# Altium PCB PCB_STM32F411CEU6 BLUE-TOOTH_2023-03-25.pcbdoc (part 2 of 2)
Units mil, origin at the board's own origin, x right, y up, seen from the top; angles counter-clockwise.
Board outline 4590 x 3510 mil, 2 copper layers (Top Layer, Bottom Layer); 160 components, 126 nets, 614 pads, 625 vias.
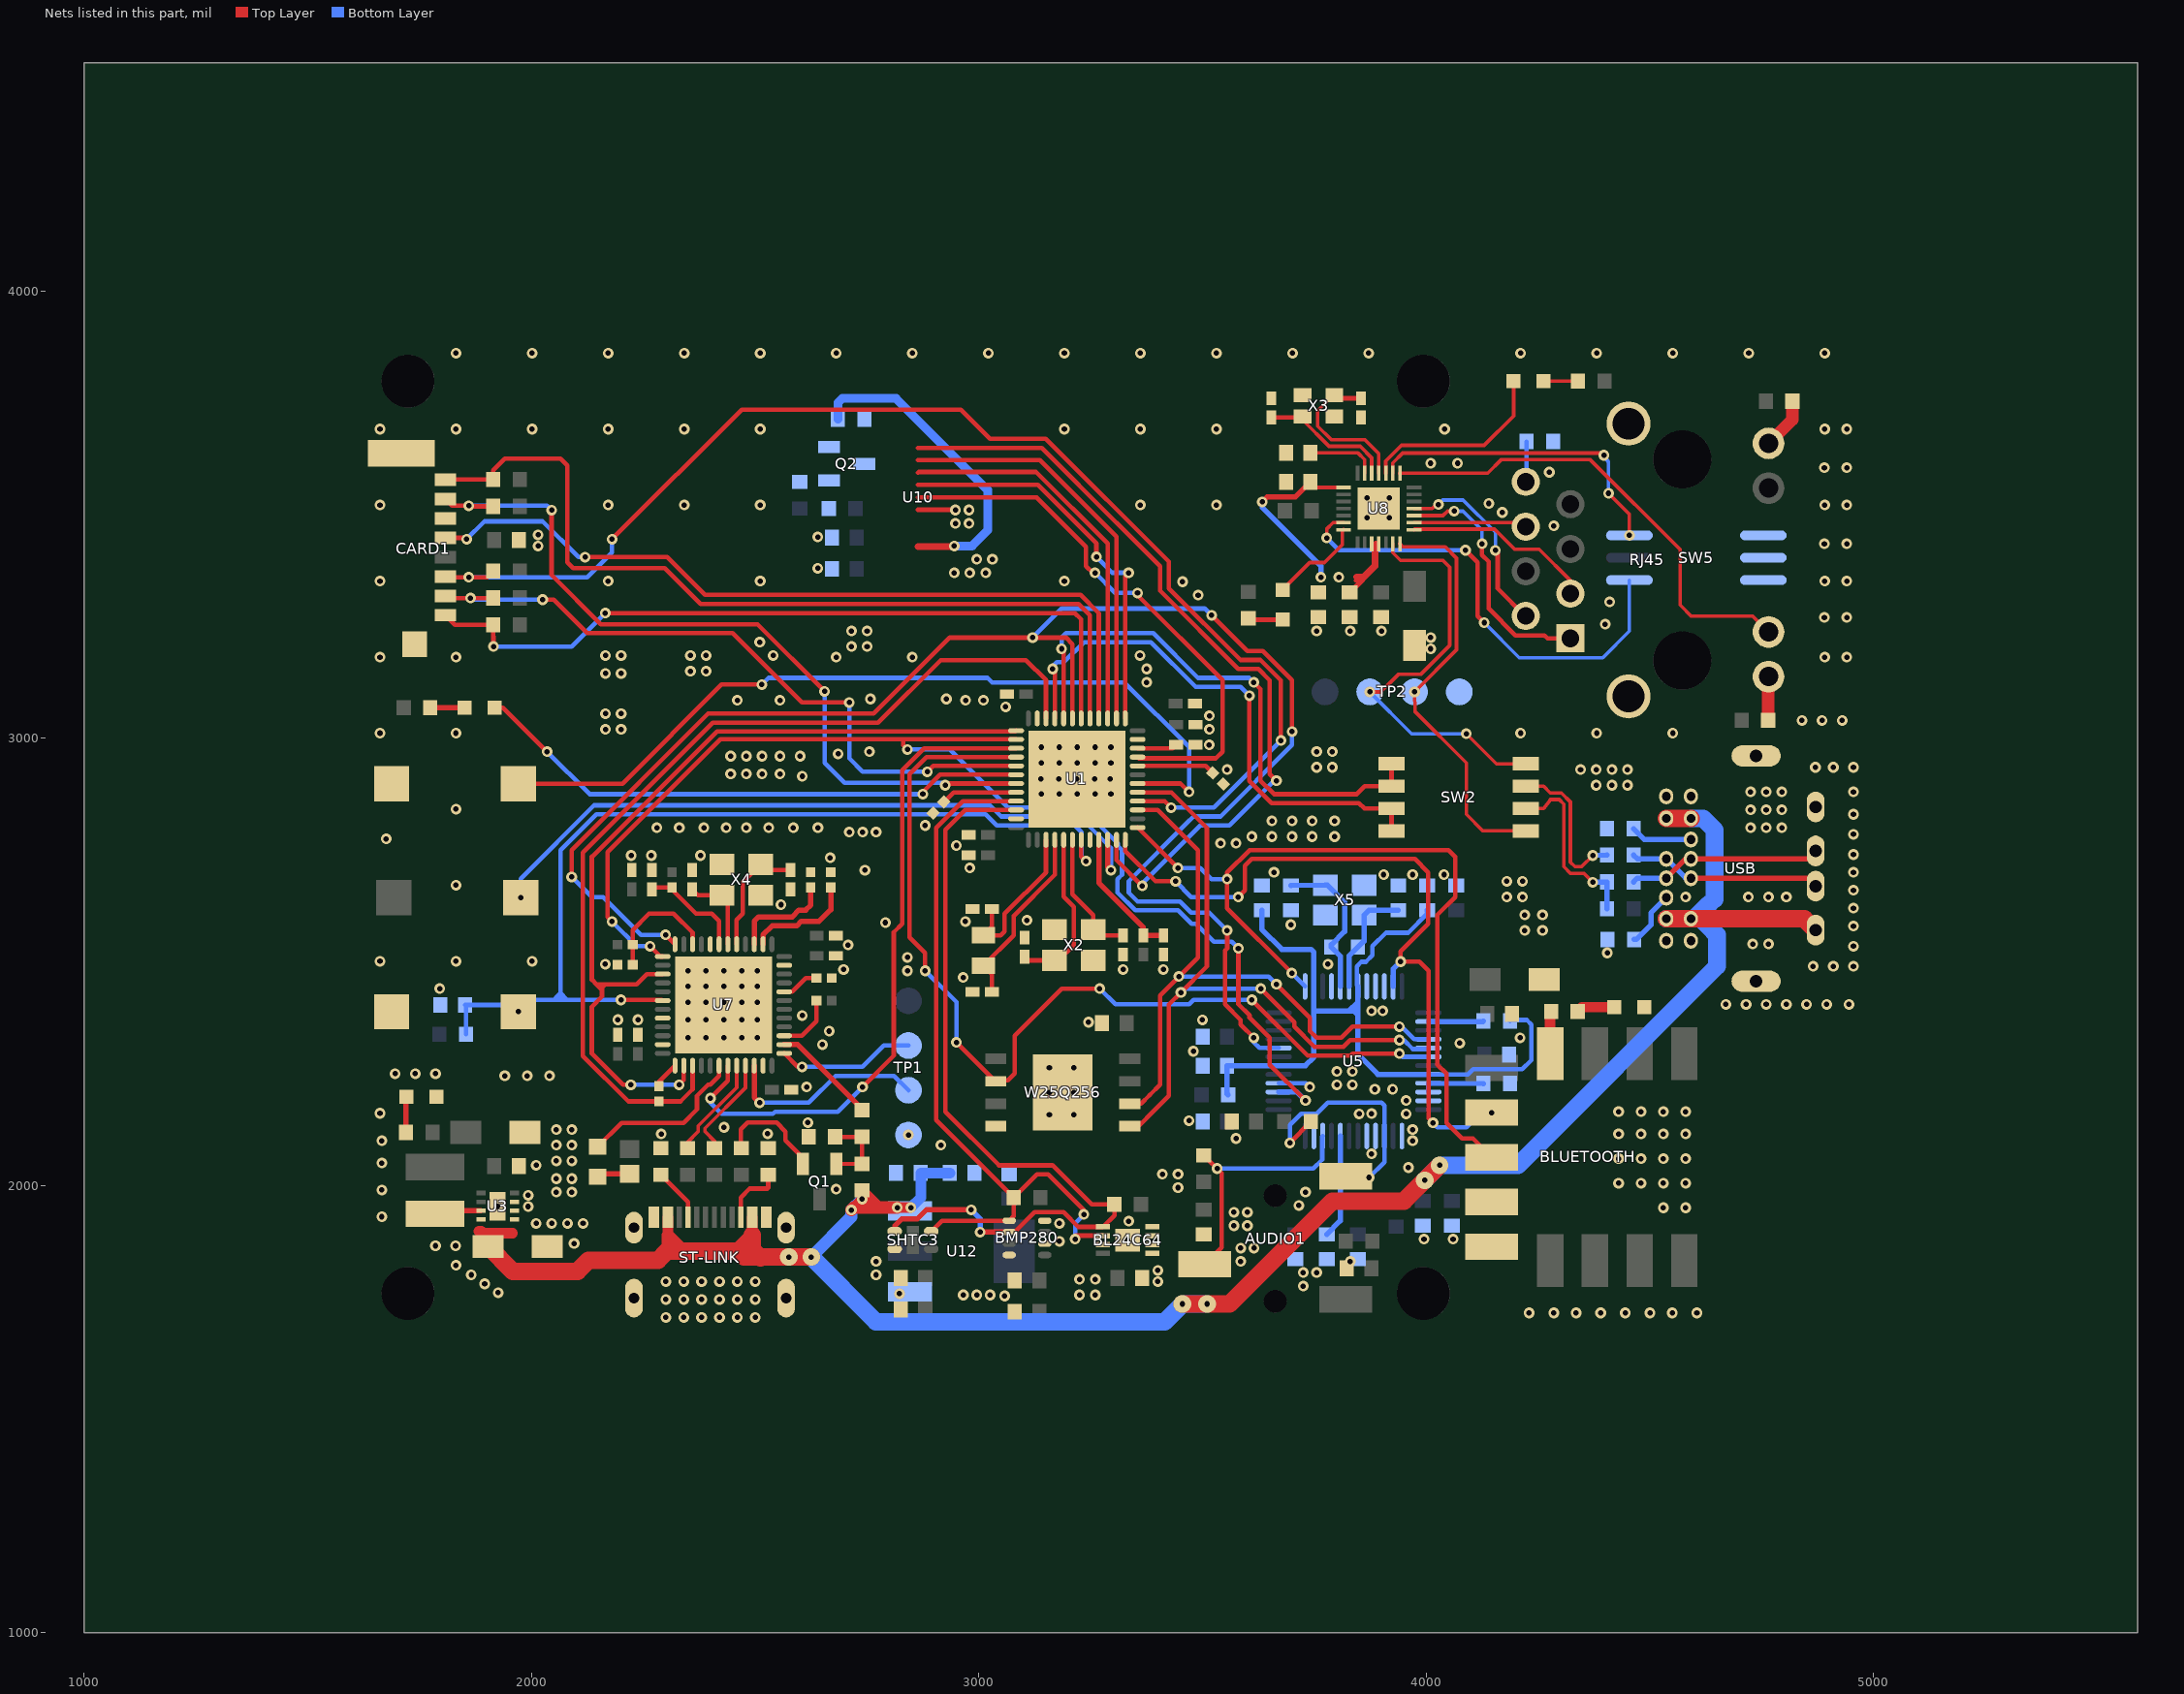
[diagram p2: the nets of this part, all layers, seen from the top]

## Via types
v1: diameter 24.02, hole 12, Top Layer to Bottom Layer, tented both sides, 546 vias
v2: diameter 24.02, hole 12.01, Top Layer to Bottom Layer, tented both sides, 73 vias
v3: diameter 39.37, hole 12, Top Layer to Bottom Layer, tented both sides, 6 vias

## Nets (pads, with @x,y where several pads share a name; then routed paths per layer and width w, separated by ;. In a path a pad name is that pad's centre, name@x,y a point inside that pad or via, vN(x,y) a via of type N, cw(c..) or ccw(c..) an arc to the next point about the centre after c; other vN are vias at no path point) (continued)
GND: BL24C64.1 BL24C64.2 BL24C64.3 BL24C64.4 BL24C64.7 BL24C64.9 BLUETOOTH.8 BLUETOOTH.9 BMP280.1 BMP280.5 BMP280.7 C1.2 C2.1 C3.2 C4.1 C5.1 C6.2 C7.1 C8.1 C9.1 C10.1 C11.2 C12.1 C13.2 C14.1 C15.1 C16.1 C17.1 C18.1 C19.1 C20.1 C21.1 C22.1 C23.2 C24.1 C25.2 C26.2 C27.2 C28.1 C30.1 C31.1 C32.1 C33.1 C34.1 C35.2 C36.2 C37.1 C38.2 C39.2 C40.2 C41.1 C42.1 C43.1 C44.1 C45.1 C46.1 C47.1 C48.1 C49.1 C50.1 C51.1 C52.1 C53.1 C54.2 C55.2 C56.2 C57.1 C58.1 C59.1 C60.1 C61.1 C62.1 C63.1 C64.1 CARD1.6 CARD1.9 CARD1.10 KEY2.2 LINK.2 POWER.2 Q2.2 R2.2 R3.1 R6.2 R7.1 R9.1 R13.2 R24.2 R30.2 R32.2 R33.2 R39.1 R42.2 R44.1 RESET.2 RJ45.SH1 RJ45.SH2 SHTC3.4 ST-LINK.1 ST-LINK.12 ST-LINK.13 ST-LINK.14 ST-LINK.15 ST-LINK.16 SW5.1 SW5.2 SW5.3 TP1.4 TP2.4 U1.8 U1.23 U1.35 U1.47 U1.49 U3.2 U3.3 U3.9 U5.4 U5.16 U5.20 U5.21 U5.22 U5.35 U5.37 U5.40 U5.41 U5.47 U7.8 U7.20 U7.23 U7.35 U7.47 U7.49 U8.29 U10.8 U10.13 U12.1 USB.1 USB.8 USB.9 USB.16 USB.20 USB.21 W25Q256.4 W25Q256.9 X2.2 X2.4 X3.2 X3.4 X4.2 X4.4 X5.2 X5.4 | length 156.9
  Top Layer w11: U10.8@2863.8,3511.4 v1(2947.57,3510.48)
  Bottom Layer w10: U5.4@3670.09,2228.59 3731.01,2228.59 v1(3739.61,2220)
  other v1: 2300.01,1705 2340.01,1705 2380.01,1705 2420.01,1705 2460.01,1705 2500.01,1705 4230.01,1715 4285.01,1715 4335.01,1715 4390.01,1715 4445.01,1715 4500.01,1715 4550.01,1715 4605.01,1715 2300.01,1745 2340.01,1745 2380.01,1745 2420.01,1745 2460.01,1745 2500.01,1745 3057.41,1752.8 2965.01,1755 2995.01,1755 3025.01,1755 3225.01,1755 3260.01,1755 2822.41,1757.8 1925.01,1760 3725.01,1775 1895.01,1780 2300.01,1785 2340.01,1785 2380.01,1785 2420.01,1785 2460.01,1785 2500.01,1785 3400.01,1785 3225.01,1790 3260.01,1790 1865.01,1800 2770.01,1800 3725.01,1805 3755.01,1805 3400.01,1810 2770.01,1830 3585.01,1830 3830.01,1830 3585.01,1860 3615.01,1860 1830.01,1865 2095.01,1870 3180.01,1875 3332.41,1877.8 3995.01,1880 4060.01,1880 3570.01,1910 3600.01,1910 2010.01,1915 2045.01,1915 2080.01,1915 2115.01,1915 3180.01,1915 3335.01,1920 1665.01,1930 3570.01,1940 3600.01,1940 4530.01,1950 4580.01,1950 1992.4,1952.8 1923.81,1953.6 3715.01,1955 1992.4,1977.8 2055.01,1985 2090.01,1985 3730.01,1985 3445.01,1995 4430.01,2005 4480.01,2005 4530.01,2005 4580.01,2005 2055.01,2015 2090.01,2015 3410.01,2025 3445.01,2025 3960.01,2040 2010.01,2045 1665.01,2050 2055.01,2055 2090.01,2055 4430.01,2060 4480.01,2060 4530.01,2060 4580.01,2060 3877.57,2070.48 2055.01,2090 2090.01,2090 2915.01,2090 3969.61,2100 3574.61,2105 2842.41,2112.8 2289.61,2115 2527.57,2115.48 4430.01,2115 4480.01,2115 4530.01,2115 4580.01,2115 2055.01,2125 2090.01,2125 3969.61,2125 2430.01,2130 2617.57,2140.48 3469.61,2145 3157.41,2157.8 3212.41,2157.8 3850.01,2160 3877.57,2160.48 3955.01,2160 4430.01,2165 4480.01,2165 4530.01,2165 4580.01,2165 3955.01,2190 3157.41,2207.8 3212.41,2207.8 3885.01,2215 3925.01,2215 2614.61,2220 3800.01,2225 3835.01,2225 1940.01,2245 1990.01,2245 2040.01,2245 1695.01,2250 1740.01,2250 1785.01,2250 3800.01,2255 3835.01,2255 3157.41,2262.8 3212.41,2262.8 3479.61,2300 2650.01,2315 2350.01,2330 2390.01,2330 2430.01,2330 2470.01,2330 2505.01,2330 4209.6,2330 2665.01,2345 3245.01,2365 2192.57,2370.48 2237.57,2370.48 2350.01,2370 2390.01,2370 2430.01,2370 2470.01,2370 2505.01,2370 3499.61,2370 2605.01,2380 3877.57,2390.48 3902.57,2390.48 4670.01,2405 4715.01,2405 4760.01,2405 4805.01,2405 4850.01,2405 4895.01,2405 4945.01,2405 2350.01,2410 2390.01,2410 2430.01,2410 2470.01,2410 2505.01,2410 1794.61,2440 2350.01,2445 2390.01,2445 2430.01,2445 2470.01,2445 2505.01,2445 2964.61,2465 2350.01,2480 2390.01,2480 2430.01,2480 2470.01,2480 2505.01,2480 2840.01,2480 2697.41,2482.8 3322.41,2482.8 3412.41,2482.8 4865.01,2490 4910.01,2490 4955.01,2490 2164.61,2495 3780.01,2495 2840.01,2510 4405.01,2520 4955.01,2535 2707.41,2537.8 4730.01,2540 4765.01,2540 4220.01,2570 4260.01,2570 4955.01,2580 3697.41,2582.8 2969.61,2590 3107.41,2592.8 4220.01,2605 4260.01,2605 4955.01,2620 2557.41,2627.8 4180.01,2645 4215.01,2645 4580.01,2645 4720.01,2645 4765.01,2645 4805.01,2645 4955.01,2660 4180.01,2680 4215.01,2680 3904.61,2695 3969.61,2695 4039.61,2695 3659.61,2700 4955.01,2700 2745.01,2705 2979.61,2710 2667.41,2732.8 2222.41,2737.8 2267.41,2737.8 2377.41,2737.8 4955.01,2740 2949.61,2760 3540.01,2765 3575.01,2765 1675.01,2775 3610.01,2780 3655.01,2780 3700.01,2780 3745.01,2780 3795.01,2780 4955.01,2785 2710.01,2790 2740.01,2790 2770.01,2790 2280.01,2800 2330.01,2800 2385.01,2800 2435.01,2800 2480.01,2800 2530.01,2800 2585.01,2800 2640.01,2800 4725.01,2800 4760.01,2800 4795.01,2800 2879.61,2805 3655.01,2815 3700.01,2815 3745.01,2815 3795.01,2815 4955.01,2830 4725.01,2840 4760.01,2840 4795.01,2840 3140.01,2875 3140.01,2875 3180.01,2875 3180.01,2875 3220.01,2875 3220.01,2875 3260.01,2875 3260.01,2875 3295.01,2875 3295.01,2875 4725.01,2880 4760.01,2880 4795.01,2880 4955.01,2880 4380.01,2895 4415.01,2895 4450.01,2895 3138.82,2908.6 3178.82,2908.6 3218.82,2908.6 3258.82,2908.6 3293.82,2908.6 2605.01,2915 2445.01,2920 2480.01,2920 2515.01,2920 2555.01,2920 3554.61,2930 4345.01,2930 4380.01,2930 4415.01,2930 4450.01,2930 3755.01,2935 3790.01,2935 4870.01,2935 4910.01,2935 4955.01,2935 3140.01,2945 3180.01,2945 3220.01,2945 3260.01,2945 3295.01,2945 2445.01,2960 2480.01,2960 2515.01,2960 2555.01,2960 2600.01,2960 2685.01,2965 2755.01,2970 3755.01,2970 3790.01,2970 3140.01,2980 3180.01,2980 3220.01,2980 3260.01,2980 3295.01,2980 3514.61,2985 2165.01,3020 2200.01,3020 3515.01,3020 3515.01,3050 2165.01,3055 2200.01,3055 3059.61,3070 2460.01,3085 2555.01,3085 2970.01,3085 3010.01,3085 3375.01,3125 2165.01,3145 2200.01,3145 2355.01,3150 2390.01,3150 3375.01,3155 4940.01,3181.39 2165.01,3185 2200.01,3185 2355.01,3185 2390.01,3185 2540.01,3185 3360.01,3185 4010.01,3200 2510.01,3215 4010.01,3225 3755.01,3240 3830.01,3240 3900.01,3240 4400.01,3255 4890.01,3270 4940.01,3270 4410.01,3305 3490.01,3320 3455.01,3350 4940.01,3351.39 2944.61,3370 2979.61,3370 3015.01,3370 2639.61,3380 2995.01,3400 3030.01,3400 2014.61,3430 4890.01,3435 4940.01,3435 2639.61,3450 2014.61,3455 4285.01,3475 2947.57,3480.48 2977.57,3480.48 3867.41,3492.8 3917.41,3492.8 4170.01,3505 2977.57,3510.48 4940.01,3521.39 4140.01,3525 3867.41,3537.8 3917.41,3537.8 4275.01,3595 4890.01,3605 4940.01,3605 4010.01,3615 4070.01,3615 4940.01,3691.39
  other v2: 1831.02,1821.39 1785.01,1865 1665.01,1990 2681.01,1991.39 1665.01,2100 1661.02,2161.39 4075.07,2318.27 1661.02,2501.39 1831.02,2501.39 2001.02,2501.39 2790.93,2587.79 1831.02,2671.39 1831.02,2841.39 1661.02,3011.39 1831.02,3011.39 4211.02,3011.39 4381.02,3011.39 4551.02,3011.39 4840.01,3040 4885.01,3040 4930.01,3040 2757.22,3087.79 2927.22,3087.79 1661.02,3181.39 1831.02,3181.39 2681.01,3181.39 2851.01,3181.39 4891.02,3181.39 2715.01,3205 2750.01,3205 2715.01,3240 2750.01,3240 1661.02,3351.39 2171.01,3351.39 2511.01,3351.39 3191.01,3351.39 4891.02,3351.39 1661.02,3521.39 2171.01,3521.39 2341.01,3521.39 2511.01,3521.39 3361.01,3521.39 3531.01,3521.39 4891.02,3521.39 1661.02,3691.39 1831.02,3691.39 2001.02,3691.39 2171.01,3691.39 2341.01,3691.39 2511.01,3691.39 3191.01,3691.39 3361.01,3691.39 3531.01,3691.39 4041.01,3691.39 4891.02,3691.39 1831.02,3861.39 2001.02,3861.39 2171.01,3861.39 2341.01,3861.39 2511.01,3861.39 2681.01,3861.39 2851.01,3861.39 3021.01,3861.39 3191.01,3861.39 3361.01,3861.39 3531.01,3861.39 3701.01,3861.39 3871.01,3861.39 4211.02,3861.39 4381.02,3861.39 4551.02,3861.39 4721.02,3861.39 4891.02,3861.39
IICSCL: BL24C64.6 BMP280.4 R48.2 SHTC3.2 U1.45 | length 1752.4
  Top Layer w8: BMP280.4@3067.71,1921.18 3077.74,1931.21 R48.2@3077.74,1972.8
  Top Layer w10: SHTC3.2@2893.35,1897.47 2917.05,1921.18 BMP280.4@3067.71,1921.18 3077.74,1931.21 R48.2@3077.74,1972.8 ; U1.45@3083.01,2859.4 2964.01,2859.4 2904.61,2800 2904.61,2145.9 3077.7,1972.8 3129.91,2025 3154.61,2025 3234.61,1945 v1(3234.61,1935) ; v1(3215.01,1880) 3215.01,1887.7 BL24C64.6@3277.3,1887.7
  Bottom Layer w10: v1(3215.01,1880) 3215.01,1915.4 v1(3234.61,1935)
IICSDA: BL24C64.5 BMP280.3 R46.2 SHTC3.3 U1.46 | length 1955.7
  Top Layer w8: BL24C64.5@3277.28,1907.33 3302.74,1932.78 R46.2@3302.74,1957.81
  Top Layer w10: BMP280.3@3067.71,1895.59 3080.2,1895.59 3124.61,1940 3189.61,1940 3222.28,1907.33 BL24C64.5@3277.28,1907.33 3302.74,1932.78 R46.2@3302.74,1957.81 ; U1.46@3083.01,2839.7 2969.3,2839.7 2924.61,2795 2924.61,2165 3044.61,2045 3164.61,2045 3251.8,1957.8 R46.2@3302.74,1957.81
  Top Layer w11.81: SHTC3.3@2811.46,1897.47 2812.57,1898.58 2812.57,1910.48 2827.57,1925.48 2862.57,1925.48 2882.57,1945.48 v1(2982.57,1945.48) ; v1(3002.57,1895.48) BMP280.3@3067.71,1895.59
  Bottom Layer w11.81: v1(2982.57,1945.48) 3002.57,1925.48 v1(3002.57,1895.48)
INT_RSET: SW5.4 U8.27 | length 1060.2
  Top Layer w8: v1(3777.41,3447.8) 3777.41,3467.8 3791.7,3482.1 U8.27@3815.07,3482.1
  Top Layer w10: v1(4087.61,3420.5) 4114.6,3393.5 4114.6,3273.5 v1(4129.66,3258.44)
  Bottom Layer w8: v1(4129.66,3258.44) 4208.1,3180 4394.6,3180 4454.1,3239.49 SW5.4@4454.1,3353.6
  Bottom Layer w10: v1(3777.41,3447.8) 3804.7,3420.5 v1(4087.61,3420.5)
IO_VDD: C52.2 C53.2 C57.2 R10.1 R18.2 U5.6 U5.14 U5.19 U5.32 | length 1846.9
  Bottom Layer w10: U5.19@3847.24,2445.12 3845,2447.36 3845,2490 3855,2500 3865,2500 3880,2515 3880,2535 3910,2565 3960,2565 4002.41,2607.41 C52.2@4002.41,2615.24 ; U5.32@4004.72,2248.27 4092.88,2248.27 4104.6,2260 4214.6,2260 4234.6,2280 4234.6,2360 4224.6,2370 4189.31,2370 R18.2@4187.06,2367.8
  Bottom Layer w11.81: C53.2@3554.96,2267.8 3554.97,2204.9 R10.1@3557.06,2202.8 ; C53.2@3554.96,2267.8 U5.6@3670.09,2267.96 ; C57.2@3632.41,2615.24 3632.41,2572.8 3677.41,2527.8 3742.41,2527.8 3748.82,2521.38 U5.14@3748.82,2445.12 3748.82,2286.74 3730.05,2267.96 U5.6@3670.09,2267.96 ; 3748.82,2388.07 3751.24,2390.48 3827.57,2390.48 ; U5.19@3847.24,2445.12 3847.2,2292.8 3891.7,2248.3 U5.32@4004.72,2248.27 ; U5.19@3847.24,2445.12 3847.24,2410.16 3827.57,2390.48 ; 3847.47,2391.63 3828.72,2391.63 3827.57,2390.48 ; 3847.53,2380.51 3837.55,2390.48 3827.57,2390.48 ; C52.2@4002.4,2612.8 C52.2@4002.41,2615.24
J1_8: R9.2 RJ45.8 | length 91
  Bottom Layer w10: RJ45.8@4222.35,3573.36 4224.15,3575.14 R9.2@4224.15,3663.6
J1_9: R16.2 RJ45.9 | length 98.1
  Top Layer w27.56: R16.2@4764.26,3040 4764.27,3136.72 RJ45.9@4765.26,3137.72
J1_12: R22.2 RJ45.12 | length 232.5
  Top Layer w10: RJ45.12@4765.26,3659.39 4818.47,3712.58 R22.2@4818.46,3753.6
  Top Layer w27.56: RJ45.12@4765.26,3659.39 4818.47,3712.58 R22.2@4818.46,3753.6
KEY1: KEY1.1 U1.10 | length 1589.7
  Top Layer w11.81: U1.10@3287.71,2772.79 3287.71,2712.3 v1(3295.01,2705)
  Bottom Layer w10: v1(1975.59,2643.54) 1975.59,2685.98 2139.6,2850 3024.61,2850 3049.61,2825 3224.61,2825 3295.01,2754.6 v1(3295.01,2705)
KEY2: KEY2.1 U1.18 | length 1884.2
  Top Layer w10: KEY2.1@1970.59,2898.55 2203.11,2898.5 2424.61,3120 v1(2514.61,3120) ; U1.18@3354.61,2898.8 3450.8,2898.8 v1(3469.61,2880)
  Bottom Layer w10: v1(2514.61,3120) 2529.61,3135 3019.61,3135 3029.61,3125 3325.01,3125 3469.61,2980.4 v1(3469.61,2880)
L1_1: L1.1 U3.7 | length 105.7
  Top Layer w11.81: L1.1@1783.81,1936.32 1791.24,1943.76 U3.7@1886.4,1943.76
LCDCS: U1.21 U10.7 | length 1235.9
  Top Layer w10: 2863.8,3538.9 3129.11,3538.9 3239.61,3428.4 3239.61,3385 3254.61,3370 v1(3259.61,3370) ; U1.21@3354.61,2957.8 3357.4,2955 3529.61,2955 3544.61,2970 3544.61,3130 3354.61,3320 v1(3354.61,3325)
  Bottom Layer w10: v1(3259.61,3370) 3304.61,3325 v1(3354.61,3325)
LCDDC: U1.27 U10.5 | length 881.8
  Top Layer w10: U10.5@2863.8,3594.07 2865.22,3595.48 3127.57,3595.48 3287.7,3435.34 U1.27@3287.71,3044.39
LCDRES: U1.25 U10.6 | length 898.4
  Top Layer w10: U10.6@2863.8,3566.51 3131.51,3566.5 3262.61,3435.5 v1(3262.61,3405.5) ; U1.25@3327.11,3044.39 3327.11,3362.5 v1(3334.61,3370)
  Bottom Layer w10: v1(3262.61,3405.5) 3298.1,3370 v1(3334.61,3370)
LCDSCL: U1.26 U10.4 | length 920.7
  Top Layer w10: U10.4@2863.8,3621.63 3136.41,3621.63 3307.41,3450.64 U1.26@3307.41,3044.39
LCDSDA: U1.11 U10.3 | length 1798.5
  Top Layer w10: U10.3@2863.8,3649.19 3140.41,3649.2 3309.11,3480.5 3314.61,3475 ; U1.11@3307.41,2772.79 3307.41,2727.6 v1(3365.01,2670) ; 3309.61,3480 3404.61,3385 3404.61,3330 3579.61,3155 3624.61,3155 3650,3129.61 3650,2920 v1(3665.01,2905)
  Bottom Layer w10: v1(3365.01,2670) 3365.01,2675 3495.01,2805 3559.61,2805 3659.61,2905 v1(3665.01,2905)
LED1: U1.42 USER.2 | length 1266.8
  Top Layer w10: USER.2@1917.31,3068.6 1936.01,3068.6 v1@2034.46,2970.15 ; v1(2874.61,2875) 2874.61,2880 2913.01,2918.4 U1.42@3083.01,2918.4
  Bottom Layer w10: v1@2034.46,2970.15 2129.61,2875 v1(2874.61,2875)
  other v1: 2034.45,2970.15
LED1_1: LINK.1 R1.1 | length 86
  Top Layer w23.62: R1.1@4338.46,2388.6 4348.47,2398.6 LINK.1@4420.31,2398.6
LED3_1: POWER.1 R12.1 | length 80.5
  Top Layer w11.81: R12.1@1719.14,2118.6 1719.14,2197.44 POWER.1@1720.31,2198.6
LED4_1: R26.1 RUN.1 | length 76.8
  Top Layer w8: RUN.1@4262.31,3798.6 R26.1@4339.15,3798.6
LED_STLINK: LED2.2 U7.30 | length 378.1
  Top Layer w10: LED2.2@2147.41,2086.26 2201.14,2140 2339.61,2140 2369.61,2170 2369.61,2200 2394.61,2225 2399.61,2225 2419.01,2244.4 U7.30@2419,2267.81
LEDK: R49.2 U10.11 | length 721.3
  Top Layer w15.75: U10.11@2863.8,3428.72 2943.32,3428.72 v1(2944.61,3430)
  Bottom Layer w19.68: R49.2@2684.49,3713.6 2684.61,3750 2694.61,3760 2814.61,3760 3019.61,3555 3019.61,3465 2984.61,3430 v1(2944.61,3430)
LINK: RJ45.10 U8.15 | length 1069.1
  Top Layer w8: U8.15@3941.04,3592.34 4137.4,3592.8 4167.4,3622.8 4366.81,3622.8 4567.4,3422.2 4567.4,3297.8 4592.4,3272.8 4730.2,3272.8 RJ45.10@4765.26,3237.72
MCU_RX6: SW2.5 TP2.3 U8.7 | length 946.9
  Top Layer w8: U8.7@3941.05,3434.85 3948.11,3427.8 4042.41,3427.8 4067.41,3402.8 4067.41,3197.8 v1(3973.8,3103.6) 3974.61,3060 4089.61,2945 4089.61,2830 4126.81,2792.8 SW2.5@4222.4,2792.8
MCU_TX: U1.38 U5.3 U7.13 | length 2816.5
  Top Layer w10: v1(2179.61,2590) 2169.61,2600 2169.61,2745.4 2421.8,2997.6 U1.38@3083.01,2997.6 ; v1(2264.61,2535) 2287.7,2511.9 U7.13@2293,2511.9 ; 2830.65,2997.6 2830.65,2984.36 v1(2840.01,2975) ; v1(3580.01,2530) 3580,2405 3605,2380 3605.01,2375 3650.01,2330 3650.01,2270 v1(3730.01,2190)
  Bottom Layer w10: v1(2179.61,2590) 2234.6,2535 v1(2264.61,2535) ; v1(2840.01,2975) 2935,2975 3065,2845 3230,2845 3310.14,2764.86 3310.14,2759.85 3320,2750 3320,2694.99 3310.01,2685 3310.01,2655 3350.01,2615 3445.01,2615 3475.01,2585 3485.01,2585 3525.01,2545 3565.01,2545 v1(3580.01,2530)
  Bottom Layer w11.81: U5.3@3670.09,2208.9 3711.11,2208.9 v1(3730.01,2190)
MCU_TX2: BLUETOOTH.6 U1.12 U5.23 | length 1706.3
  Top Layer w10: U1.12@3327.11,2772.79 3327.11,2747.5 3394.61,2680 v1(3439.61,2680) ; v1(3579.61,2645) 3594.61,2660 3594.61,2715 3609.61,2730 3974.61,2730 4004.61,2700 4004.61,2585 3942.57,2522.96 v1(3942.57,2500.48) 3984.52,2500.48 4005,2480 4005,2150 v1(4015.01,2140) ; BLUETOOTH.6@4117.15,2162.85 v1(4146.56,2162.85)
  Bottom Layer w10: v1(3439.61,2680) 3474.61,2645 v1(3579.61,2645) ; v1(4015.01,2140) 4025,2130 4090,2130 4122.85,2162.85 v1(4146.56,2162.85)
  Bottom Layer w11.81: U5.23@3925.98,2445.12 3925.99,2483.9 v1(3942.57,2500.48)
MCU_TX6: SW2.8 TP2.2 U8.6 | length 972.4
  Top Layer w8: v1(3873.8,3103.6) 3898.2,3103.6 3937.41,3142.8 3987.41,3142.8 4052.41,3207.8 4052.41,3382.8 4037.41,3397.8 3942.41,3397.8 3925.3,3414.9 U8.6@3925.31,3434.86 ; v1(4089.61,3010) 4156.81,2942.8 SW2.8@4222.4,2942.8
  Bottom Layer w8: v1(3873.8,3103.6) 3967.41,3010 v1(4089.61,3010)
MP3_LEFT: AUDIO1.2 R51.1 U5.46 | length 572.2
  Top Layer w10: R51.1@3502.41,2067.45 3542.41,2027.46 3542.41,1861.22 AUDIO1.2@3504.93,1823.74
  Bottom Layer w10: v1(3532.41,2037.8) 3747.41,2037.8 3767.41,2057.8 3767.41,2109.4 U5.46@3768.51,2110.48
MP3_RIGHT: AUDIO1.3 R52.1 U5.39 | length 570.3
  Top Layer w10: v1(3695.01,2095) R52.1@3742.06,2142.8 ; AUDIO1.3@3819.89,2020.6 3869.61,2020.6 v1(3872.41,2017.8)
  Bottom Layer w10: v1(3695.01,2095) 3695.01,2135.01 3720,2160 3755,2160 3780,2185 3900,2185 3906.3,2178.7 U5.39@3906.31,2110.48 3906.3,2051.7 v1(3872.41,2017.8)
MUC_RX: U1.31 U5.8 U7.12 | length 3776.1
  Top Layer w10: v1(2089.61,2690) 2089.61,2750 2394.61,3055 2764.61,3055 2934.61,3225 3194.61,3225 3209.01,3210.6 U1.31@3209.01,3044.39 ; v1@2299.61,2565 v1(2299.61,2560.3) U7.12@2320.5,2539.41 ; v1(3520.01,3275) 3600,3195 3635,3195 3700,3130 v1(3700.01,3015) ; v1(3555.01,2570) 3555.01,2530 3550.01,2525 3550.01,2405 3585.01,2370 3585.01,2359.6 v1(3614.61,2330)
  Bottom Layer w10: v1(2089.61,2690) 2134.61,2645 2159.61,2645 2244.3,2560.3 v1(2299.61,2560.3) ; v1(3120.01,3225) 3185,3290 3505.01,3290 v1(3520.01,3275) ; v1(3555.01,2570) 3515.01,2610 3474.61,2610 3449.61,2635 3354.61,2635 3335.01,2654.6 3335.01,2680.4 3464.61,2810 3479.61,2825 3540,2825 3700.01,2985 v1(3700.01,3015) ; v1(3614.61,2330) 3614.61,2320 3627.28,2307.33 U5.8@3670.09,2307.33
MUC_RX2: BLUETOOTH.7 U1.13 U5.13 | length 1870.1
  Top Layer w10: U1.13@3354.61,2800.3 v1(3444.91,2710) v1@3449.61,2710 ; v1(3699.61,2475) 3554.61,2620 v1(3554.61,2685) 3554.61,2699.6 3605.01,2750 4050.01,2750 4065.01,2735 4065.01,2645 4025.01,2605 4025.01,2270 4045.01,2250 4045.01,2140 4080.01,2105 4104.4,2105 BLUETOOTH.7@4146.56,2062.85
  Bottom Layer w10: v1(3444.91,2710) 3494.61,2710 3519.61,2685 v1(3554.61,2685) ; v1(3699.61,2475) 3699.61,2474.65 U5.13@3729.13,2445.12
NRST: C5.2 R5.2 RESET.1 U1.7 U7.18 | length 2237.1
  Top Layer w10: v1(2199.61,2415) 2291.41,2415 U7.18@2293,2413.4 ; U1.7@3228.61,2772.79 3228.61,2736 v1(3239.61,2725)
  Bottom Layer w10: R5.2@1853.26,2337.8 1853.27,2401.7 C5.2@1851.36,2403.6 1955.53,2403.6 v1(1970.59,2388.54) 1997.05,2415 v1(2199.61,2415) ; 2054.11,2415 2054.11,2419.19 2064.61,2429.69 ; 2064.61,2415 2064.61,2429.7 ; 2079.3,2415 2064.61,2429.7 ; v1(3239.61,2725) 3229.61,2735 3229.61,2790 3214.61,2805 3039.61,2805 3014.61,2830 2144.61,2830 2064.61,2750 2064.61,2429.7
PA11: SW2.1 SW2.2 U1.32 | length 1251.1
  Top Layer w10: v1(3184.61,3200) 3189.3,3195.3 U1.32@3189.31,3044.39 ; v1(3614.61,3125) 3629.61,3110 3629.61,2905 3659.61,2875 3844.61,2875 3862.41,2892.8 SW2.2@3922.41,2892.8 SW2.1@3922.41,2942.8
  Bottom Layer w10: v1(3184.61,3200) 3184.61,3225 3194.61,3235 3389.61,3235 3489.61,3135 3604.61,3135 v1(3614.61,3125)
PA12: SW2.3 SW2.4 U1.33 | length 1213.7
  Top Layer w10: v1(3164.61,3155) 3169.61,3150 U1.33@3169.61,3044.39 ; v1(3604.61,3095) 3604.61,2905 3654.61,2855 3849.61,2855 3861.8,2842.8 SW2.3@3922.41,2842.8 SW2.4@3922.41,2792.8
  Bottom Layer w10: v1(3164.61,3155) 3164.61,3160 3174.61,3170 3189.61,3170 3234.61,3215 3384.61,3215 3484.61,3115 3584.61,3115 v1(3604.61,3095)
R14_1: Q1.2 R14.1 | length 245.8
  Top Layer w10: R14.1@2468.8,2083.26 2467.57,2084.5 2467.57,2125.48 2482.57,2140.48 2547.57,2140.48 2567.57,2120.48 2567.57,2100.48 2606.41,2061.64 Q1.2@2606.4,2047.97
R23_2: LED2.1 R23.2 | length 74.2
  Top Layer w11.81: LED2.1@2147.41,2019.33 2154.11,2026.04 R23.2@2218.8,2026.04
R27_1: R27.1 TCP.1 | length 77.7
  Top Layer w10: R27.1@3602.41,3268.14 3605.45,3265.1 TCP.1@3678.8,3265.1
R31_1: R31.1 USER.1 | length 76.8
  Top Layer w11.81: R31.1@1773.46,3068.6 USER.1@1850.31,3068.6
R32_1: R32.1 ST-LINK.10 | length 143.5
  Top Layer w10: ST-LINK.10@2467.69,1929.2 2467.7,1973.09 2487.41,1992.8 2527.41,1992.8 2528.8,1994.2 R32.1@2528.8,2023.94
R33_1: R33.1 ST-LINK.4 | length 119.9
  Top Layer w10: R33.1@2288.8,2023.94 2349.59,1963.16 ST-LINK.4@2349.58,1929.2
R40_1: Q1.1 R34.1 R39.2 R40.1 | length 178.6
  Top Layer w10: R39.2@2678.46,2108.6 R40.1@2738.8,2108.95 ; Q1.1@2681.21,2047.97 R34.1@2738.8,2048.26 ; R34.1@2738.8,2048.26 R40.1@2738.8,2108.95
R49_1: Q2.3 R49.1
R50_2: Q2.1 R47.1 R50.2
RESTI: SW5.6 U8.16 | length 708.3
  Top Layer w8: U8.16@3925.3,3592.33 3925.3,3615.7 3947.41,3637.8 4392.4,3637.8 v1(4397.4,3632.8) ; v1(4407.4,3547.8) 4454.1,3501.11 v1(4454.1,3453.6)
  Bottom Layer w8: v1(4397.4,3632.8) 4407.4,3617.8 v1(4407.4,3547.8)
RXN: RJ45.6 U8.9 | length 253.4
  Top Layer w8: U8.9@3972.55,3482.09 4213.61,3482.09 RJ45.6@4222.35,3473.36
RXP: RJ45.3 U8.8 | length 427.5
  Top Layer w8: U8.8@3972.55,3466.36 3973.99,3467.8 4152.4,3467.8 4197.4,3422.8 4252.4,3422.8 4322.35,3352.85 RJ45.3@4322.35,3323.36
S$67: 
S$69: 
S$147634: 
S$147638: 
S$147642: 
S$147646: 
S$147650: 
S$147654: 
S$147658: 
S$266549: 
S$266553: 
SDIO_CK: CARD1.5 U1.28 | length 1799.5
  Top Layer w10: CARD1.5@1806.99,3448.2 1851.4,3448.21 v1(1854.61,3445) ; v1(2119.61,3405) 2303.1,3405 2387.6,3320.5 3227.6,3320.5 3268,3280 U1.28@3268.01,3044.39
  Bottom Layer w10: v1(1854.61,3445) 1894.6,3485 2024.61,3485 2104.61,3405 v1(2119.61,3405)
SDIO_CMD: CARD1.3 R29.2 U1.16 | length 2910.8
  Top Layer w10: CARD1.3@1806.99,3361.59 1808.58,3360 v1(1859.61,3360) 1900.54,3360 R29.2@1914.14,3373.6 ; v1(2179.61,3445) 2469.61,3735 2959.61,3735 3024.61,3670 3149.61,3670 3424.61,3395 3424.61,3335 3584.61,3175 3629.61,3175 3675.01,3129.6 v1(3675.01,2995) ; U1.16@3354.61,2859.4 3415.2,2859.4 v1(3429.61,2845)
  Bottom Layer w10: v1(1859.61,3360) 2124.61,3360 2179.61,3415 v1(2179.61,3445) ; v1(3429.61,2845) 3525.01,2845 v1(3675.01,2995)
SDIO_D0: CARD1.7 R19.1 U1.43 | length 1776.4
  Top Layer w10: CARD1.7@1806.98,3534.82 1821.81,3520 v1(1859.61,3520) 1861.01,3518.6 R19.1@1914.14,3518.6 ; v1(2044.61,3510) 2044.61,3365 2154.61,3255 2505.01,3255 v1(2655.01,3105) ; v1(2924.61,2895) 2928.41,2898.8 U1.43@3083.01,2898.8
  Bottom Layer w10: v1(1859.61,3520) 2034.61,3520 v1(2044.61,3510) ; v1(2655.01,3105) 2655.01,2945 2700.01,2900 2919.61,2900 v1(2924.61,2895)
SDIO_D1: CARD1.8 R35.1 U1.29 | length 1974.8
  Top Layer w10: CARD1.8@1806.98,3578.13 R35.1@1914.11,3578.6 ; R35.1@1914.14,3578.6 1914.14,3599.54 1939.61,3625 2064.61,3625 2079.61,3610 2079.61,3393.5 2092.61,3380.5 2297.61,3380.5 2377.51,3300.5 3222.61,3300.5 3247.61,3275.5 U1.29@3247.61,3044.4
SDIO_D2: CARD1.1 R4.2 U1.30 | length 1737.1
  Top Layer w10: CARD1.1@1806.99,3274.97 1828.37,3253.6 R4.2@1914.14,3253.6 ; R4.2@1914.11,3253.6 v1(1914.61,3205) ; v1(2164.61,3280) 3214.61,3280 3228.61,3266 U1.30@3228.61,3044.39
  Bottom Layer w10: v1(1914.61,3205) 2089.6,3205 v1(2164.61,3280)
SDIO_D3: CARD1.2 R17.2 U1.41 | length 1568.5
  Top Layer w10: CARD1.2@1806.99,3318.29 1811.67,3313.6 v1(1863.19,3313.6) R17.2@1914.14,3313.6 ; v1(2024.61,3310) 2049.61,3310 2124.61,3235 2449.61,3235 2604.61,3080 v1(2710.01,3080) ; v1(2884.61,2925) 2897.7,2938.1 U1.41@3083.01,2938.1
  Bottom Layer w10: v1(1863.19,3313.6) 1866.8,3310 v1(2024.61,3310) ; v1(2710.01,3080) 2710.01,2955 2740.01,2925 v1(2884.61,2925)
SPI1MISO: U1.40 U5.30 W25Q256.2 | length 2199.9
  Top Layer w10: v1(2879.61,2480) 2879.61,2520 2844.61,2555 2844.61,2920 2882.4,2957.8 U1.40@3083.01,2957.8 ; v1(2949.61,2320) 3036.77,2232.83 W25Q256.2@3037.78,2232.84 3039.94,2235 3064.61,2235 3079.61,2250 3079.61,2335 3184.61,2440 v1(3270.01,2440) ; v1(3610.01,2415) 3735.01,2290 3830,2290 3835,2295 3845,2295 v1(3940.01,2295)
  Bottom Layer w10: v1(2879.61,2480) 2949.61,2410 v1(2949.61,2320) ; v1(3270.01,2440) 3305.01,2405 3470.01,2405 3480.01,2415 v1(3610.01,2415)
  Bottom Layer w11.81: v1(3940.01,2295) 3947.36,2287.64 U5.30@4004.72,2287.64
SPI1MOSI: U1.17 U5.29 W25Q256.5 | length 1570.2
  Top Layer w10: W25Q256.5@3336.98,2132.84 3357.43,2132.83 3374.66,2150.05 ; U1.17@3354.61,2879.1 3430.51,2879.1 3509.61,2800 3509.61,2489.6 v1(3451.61,2431.6) 3424.61,2404.6 3424.61,2200 3374.61,2150.1 ; v1(3630.01,2440) 3705.01,2365 3705.01,2355 3750.01,2310 3815.01,2310 3830.01,2325 v1(3940.01,2325)
  Bottom Layer w10: v1(3451.61,2431.6) 3460.01,2440 v1(3630.01,2440) ; v1(3940.01,2325) 3950,2325 3970,2305 4002.39,2305 U5.29@4004.72,2307.33
SPI1SCK: U1.15 U5.28 W25Q256.6 | length 1471.4
  Top Layer w10: W25Q256.6@3336.98,2182.84 3362.41,2182.8 3381.6,2201.99 3404.61,2225 3404.61,2424.6 v1(3447.11,2467.1) 3489.61,2509.6 3489.61,2750 3399.91,2839.7 U1.15@3354.61,2839.7 ; v1(3665.01,2450) 3740,2375 3740,2345 3755,2330 3810,2330 3835,2355 v1(3940.01,2355)
  Bottom Layer w10: v1(3447.11,2467.1) 3647.9,2467.1 v1(3665.01,2450) ; v1(3940.01,2355) 3945,2355 3972.99,2327.01 U5.28@4004.72,2327.01
ST_SWCLK: TP1.2 U7.37 | length 310.2
  Top Layer w10: U7.37@2564.6,2295.3 2594.91,2265 v1(2604.61,2265)
  Bottom Layer w10: v1(2604.61,2265) 2739.61,2265 2787.41,2312.8 TP1.2@2842.41,2312.8
ST_SWDIO: TP1.3 U7.34 | length 458.7
  Top Layer w11.81: U7.34@2497.7,2267.81 2497.71,2196.9 v1(2509.61,2185)
  Bottom Layer w10: v1(2509.61,2185) 2619.61,2185 2679.61,2245 2810.2,2245 TP1.3@2842.41,2212.8
STLUSBD+: R21.2 U7.33 | length 230.7
  Top Layer w8: R21.2@2408.8,2083.26 2408.8,2099.2 2387.61,2120.5 2387.61,2128 2478.01,2218.4 U7.33@2478,2267.81
STLUSBD-: R20.2 U7.32 | length 229.9
  Top Layer w8: R20.2@2348.8,2083.26 2348.8,2096.7 2372.61,2120.5 2372.61,2133 2458.3,2218.7 U7.32@2458.3,2267.81
T_JTCK_SWCLK: U1.37 U7.15 U7.26 | length 1982.6
  Top Layer w10: 2171.14,2450 2164.05,2450 2154.33,2440.28 ; v1(2221.76,2225) 2204.61,2225 2134.61,2295 2134.61,2400 2157.33,2422.72 2157.33,2440.28 2154.33,2440.28 ; U7.15@2293,2472.5 2257.11,2472.5 2234.61,2450 2144.61,2450 ; v1(2329.61,2225) 2340.2,2235.6 U7.26@2340.2,2267.81 ; U1.37@3083.01,3016.9 3081.11,3015 2414.61,3015 2134.61,2735 2134.61,2460 2144.61,2450 ; 2144.61,2450 2154.33,2440.28
  Bottom Layer w10: v1@2214.61,2225 v1(2329.61,2225)
T_JTMS_SWDIO: R43.2 U1.34 U7.27 | length 2123.6
  Top Layer w10: R43.2@2284.61,2187.96 2332.86,2187.96 2359.91,2215 U7.27@2359.9,2267.81 ; R43.2@2284.61,2187.96 2216.61,2188 2114.61,2289.6 2114.61,2744.6 2404.61,3034.6 2774.61,3034.6 2914.61,3174.6 3105.01,3174.6 3149.91,3129.7 U1.34@3149.91,3044.39
T_SWDIO_IN: R43.1 U7.25 | length 60.6
  Top Layer w10: R43.1@2284.61,2222.04 2284.61,2231.9 U7.25@2320.5,2267.81
T_SWO: U1.39 U7.31 | length 1494.5
  Top Layer w10: v1(2399.61,2195) 2438.61,2234 U7.31@2438.6,2267.81 ; v1(2739.61,2220) 2809.61,2290 2809.61,2566.1 2828.61,2585 2828.61,2928.9 2877.11,2977.5 U1.39@3083.01,2977.5
  Bottom Layer w10: v1(2399.61,2195) 2399.61,2185 2424.61,2160 2539.61,2160 2544.61,2165 2684.61,2165 v1(2739.61,2220)
TXN: RJ45.2 U8.11 | length 435.9
  Top Layer w8: U8.11@3972.55,3513.59 4013.2,3513.59 4022.41,3522.8 v1(4027.41,3522.8)
  Top Layer w10: v1(4154.6,3420) 4159.6,3415 4159.6,3335 4221.26,3273.35 RJ45.2@4222.35,3273.36
  Bottom Layer w8: v1(4027.41,3522.8) 4037.4,3532.8 4082.4,3532.8 4154.6,3460.6 v1(4154.6,3420)
TXP: RJ45.1 U8.10 | length 565.8
  Top Layer w8: U8.10@3972.55,3497.84 4037.45,3497.84 4047.41,3507.8 v1(4062.41,3507.8)
  Top Layer w10: v1(4124.6,3435) 4124.6,3410 4139.6,3395 4139.6,3290 4199.6,3230 4264.6,3230 4271.24,3223.36 RJ45.1@4322.35,3223.36
  Bottom Layer w8: v1(4062.41,3507.8) 4082.4,3507.8 4124.6,3465.6 v1(4124.6,3435)
U1_3: C23.1 U1.3 X1.1 | length 360.7
  Top Layer w10: X1.1@3009.91,2559.26 3028.86,2578.22 C23.1@3028.86,2617.8 ; X1.1@3009.91,2559.26 3048.91,2559.3 3057.41,2567.8 3057.41,2607.8 3149.91,2700.3 U1.3@3149.91,2772.79
U1_4: C6.1 U1.4 X1.2 | length 414
  Top Layer w10: X1.2@3009.91,2491.34 3077.41,2558.8 3077.41,2602.8 3169.61,2695 U1.4@3169.61,2772.79 ; X1.2@3009.91,2491.34 3028.86,2472.38 C6.1@3028.86,2432.8
U1_5: C18.2 U1.5 X2.3 | length 372.2
  Top Layer w10: C18.2@3102.41,2511.34 3110.41,2503.34 X2.3@3169.1,2503.34 3177.95,2503.34 3212.41,2537.8 3212.41,2622.8 3189.3,2645.9 U1.5@3189.31,2772.79
U1_6: C8.2 U1.6 X2.1 | length 292
  Top Layer w10: U1.6@3209.01,2772.79 3209.01,2651.2 3255.72,2604.49 X2.1@3255.71,2572.24 3268.7,2559.26 C8.2@3322.41,2559.26
U1_9: C26.1 L2.2 U1.9 | length 299.7
  Top Layer w11.81: U1.9@3268.01,2772.79 3268.01,2676.6 3367.41,2577.2 L2.2@3367.41,2559.26 C26.1@3412.41,2559.26
U1_20: R6.1 U1.20 | length 174.6
  Top Layer w10: U1.20@3354.61,2938.1 3506.51,2938.1 R6.1@3522.56,2922.05
U1_22: C4.2 U1.22 | length 89.8
  Top Layer w10: U1.22@3354.61,2977.5 3433.12,2977.5 C4.2@3441.11,2985.48
U1_44: R3.2 U1.44 | length 170.6
  Top Layer w10: R3.2@2921.44,2857.26 2943.28,2879.1 U1.44@3083.01,2879.1
U2_4: BLUETOOTH.4 R1.2 | length 94.5
  Top Layer w23.62: BLUETOOTH.4@4277.03,2295.02 4277.03,2386.49 R1.2@4279.15,2388.6
U5_17: C10.2 R15.2 U5.17 X5.1 | length 344.3
  Bottom Layer w11.81: C10.2@3697.41,2670.36 X5.1@3774.1,2671.26 ; X5.1@3774.1,2671.26 3778.94,2671.27 3817.4,2632.8 3817.4,2567.8 3787.74,2538.14 3787.74,2532.8 3807.88,2512.67 U5.17@3807.87,2445.12
U5_18: C45.2 R15.1 U5.18 X5.3 | length 254.2
  Bottom Layer w11.81: U5.18@3827.56,2445.12 3827.57,2513.3 R15.1@3847.06,2532.8 3860.71,2546.45 X5.3@3860.71,2604.33 3871.62,2615.24 C45.2@3937.41,2615.24
U5_26: R18.1 U5.26 | length 123.6
  Bottom Layer w11.81: U5.26@4004.72,2366.38 4126.32,2366.38 R18.1@4127.74,2367.8
U5_33: R24.1 U5.33 U5.34 | length 142.7
  Bottom Layer w10: U5.34@4004.72,2208.9 U5.33@4004.72,2228.59
  Bottom Layer w11.81: U5.33@4004.72,2228.59 R24.1@4127.7,2227.8
U5_44: C47.2 U5.44 | length 232.7
  Bottom Layer w11.81: C47.2@3777.41,1890.36 3807.88,1920.83 U5.44@3807.88,2110.48
U7_2: R13.1 U7.2 | length 245.5
  Top Layer w11.81: U7.2@2517.4,2539.41 2517.41,2560.32 2537.57,2580.48 2592.57,2580.48 2602.57,2590.48 2642.57,2590.48 2668.8,2616.72 R13.1@2668.8,2666.56
U7_3: R30.1 U7.3 | length 232.1
  Top Layer w11.81: U7.3@2497.7,2539.41 2497.7,2590.62 2507.57,2600.48 2582.57,2600.48 2597.57,2615.48 2612.57,2615.48 2623.8,2626.72 R30.1@2623.8,2666.56
U7_5: C28.2 U7.5 X4.3 | length 273
  Top Layer w10: U7.5@2458.3,2539.41 2458.3,2593.7 2472.41,2607.8 2472.41,2678.34 2512.11,2718.05 2525.11,2705.06 C28.2@2578.8,2705.06
U7_6: C30.2 U7.6 X4.1 | length 187.3
  Top Layer w10: C30.2@2358.8,2662.14 2371.8,2649.15 X4.1@2425.5,2649.16 2438.61,2636.04 U7.6@2438.6,2539.41
U7_7: C31.2 R37.1 U7.7 | length 238.1
  Top Layer w10: C31.2@2268.8,2662.14 2273.22,2666.56 R37.1@2313.8,2666.56 ; R37.1@2313.8,2666.56 2313.8,2661.4 2367.41,2607.8 2402.41,2607.8 2419.01,2591.2 U7.7@2419,2539.41
U7_10: R41.2 R42.1 U7.10 | length 270.3
  Top Layer w10: R42.1@2225.84,2493.6 R41.2@2225.84,2538.6 2225.84,2571.24 2262.41,2607.8 2317.41,2607.8 2359.91,2565.3 U7.10@2359.9,2539.41
U7_39: R45.2 U7.39 | length 132
  Top Layer w10: U7.39@2564.6,2334.7 2604.3,2334.7 2636.76,2367.16 R45.2@2636.76,2413.6
U7_44: R44.2 U7.44 | length 84.8
  Top Layer w10: U7.44@2564.6,2433.1 2582.7,2433.1 2613.2,2463.6 R44.2@2636.76,2463.6
U8_17: RUN.2 U8.17 | length 433.1
  Top Layer w8: U8.17@3909.54,3592.34 3909.51,3619.9 3944.61,3655 4129.6,3655 4195.31,3720.7 RUN.2@4195.31,3798.6
U8_18: C21.2 U8.18 X3.3 | length 354.5
  Top Layer w8: X3.3@3794.23,3767.22 3791.82,3767.22 3757.41,3732.8 3757.41,3697.8 3787.41,3667.8 3862.41,3667.8 3893.8,3636.4 U8.18@3893.8,3592.34
  Top Layer w10: X3.3@3794.23,3767.22 3801.39,3760.06 C21.2@3853.8,3760.06
U8_19: C12.2 U8.19 X3.1 | length 303.5
  Top Layer w8: X3.1@3723.38,3719.98 3723.41,3711.8 3782.41,3652.8 3852.41,3652.8 3878.11,3627.1 U8.19@3878.06,3592.33
  Top Layer w10: C12.2@3653.8,3717.14 3720.53,3717.14 X3.1@3723.38,3719.98
U8_20: C41.2 U8.20 | length 157.7
  Top Layer w8: C41.2@3741.36,3638.6 3847.41,3637.8 3862.3,3622.9 U8.20@3862.3,3592.34
U8_28: TCP.2 U8.28 | length 210
  Top Layer w8: TCP.2@3678.8,3332.1 3739.51,3392.8 3772.41,3392.8 3812.41,3432.8 3812.41,3463.7 U8.28@3815.07,3466.36
USB1_3: R2.1 USB.3 | length 126.4
  Bottom Layer w11.81: R2.1@4464.65,2550 4469.6,2550 4502.4,2582.8 4502.4,2609.39 USB.3@4536.65,2643.64
USB1_4: R8.1 USB.4 USB.12 USB.19 | length 435.8
  Top Layer w11.81: USB.4@4536.65,2686.95 4579.95,2730.25 4591.77,2730.25 4852.8,2730.25 USB.19@4870.51,2747.97
  Bottom Layer w11.81: R8.1@4463.46,2678.6 4471.81,2686.95 USB.4@4536.65,2686.95
USB1_5: R11.1 USB.5 USB.13 USB.18 | length 435.8
  Top Layer w11.81: USB.13@4591.77,2686.95 4852.8,2686.95 USB.18@4870.51,2669.23
  Bottom Layer w11.81: R11.1@4463.46,2738.6 4471.81,2730.25 4536.65,2730.25 4579.95,2686.95 USB.13@4591.77,2686.95
USB1_11: R7.2 USB.11 | length 138.6
  Bottom Layer w11.81: R7.2@4463.26,2797.8 4487.51,2773.56 USB.11@4591.77,2773.56
USBD+: R8.2 R25.1 SW2.6 | length 410.3
  Top Layer w8: SW2.6@4222.4,2842.8 4262.4,2842.8 4277.4,2862.8 4297.4,2862.8 4307.4,2852.8 4307.4,2712.8 4322.4,2697.8 4352.4,2697.8 v1(4372.4,2677.8)
  Bottom Layer w11.81: v1(4372.4,2677.8) R8.2@4404.1,2678.6 ; R25.1@4404.15,2618.6 R8.2@4404.15,2678.6
USBD-: R11.2 SW2.7 | length 345.7
  Top Layer w8: SW2.7@4222.4,2892.8 4262.4,2892.8 4277.4,2877.8 4302.4,2877.8 4322.4,2857.8 4322.4,2722.8 4332.4,2712.8 4347.4,2712.8 v1(4372.4,2737.8)
  Bottom Layer w11.81: v1(4372.4,2737.8) R11.2@4404.1,2738.6
USBRENUMN: R40.2 U7.38 | length 236.5
  Top Layer w11.81: U7.38@2564.6,2315 2594.61,2315 2738.8,2170.8 R40.2@2738.8,2168.26
VBUS: C3.1 C50.2 C51.2 R34.2 ST-LINK.2 ST-LINK.11 U3.1 U3.8 U12.3 USB.2 USB.7 USB.10 USB.15 USB.17 | length 5983.4
  Top Layer w23.62: 1882.4,1897.8 1902.41,1877.79 C3.1@1902.42,1863.6 1931.62,1892.8 1957.4,1892.8 1892.4,1892.8 1887.4,1897.8 ; 2302.41,1852.8 2302.41,1889 2304.3,1890.9 ; ST-LINK.2@2304.3,1929.2 2304.3,1890.9 ; ST-LINK.11@2493.28,1929.2 2493.3,1883.7 ; 2512.85,1837.8 2497.88,1852.76 2497.88,1879.12 2493.3,1883.7 ; v3(2625.01,1840) v3(2575.01,1840) 2475.2,1840 2462.4,1852.8 ; v1(2714.7,1945.08) v1(2738.8,1969.2) R34.2@2738.8,1988.94 2777.26,1950.48 v1(2817.57,1950.48) v1(2847.57,1950.48) ; 2728.86,1959.26 2730.07,1960.47 2767.28,1960.47 ; 2304.3,1890.9 2342.41,1852.8 2462.41,1852.8 ; 2462.41,1852.8 2493.3,1883.7
  Top Layer w27.56: v1(2714.7,1945.08) 2720.09,1950.48 v1(2817.57,1950.48)
  Top Layer w39.37: C3.1@1902.42,1863.6 1958.21,1807.8 2102.41,1807.8 2127.41,1832.8 2282.41,1832.8 2302.41,1852.8 ; 2413.54,1852.8 2302.41,1852.8 ; 2511.36,1837.8 2493.3,1855.86 2493.3,1888.97 2493.3,1883.7 2486.86,1877.26 2462.41,1852.8 ; v3(2625.01,1840) 2475.2,1840 2462.4,1852.8 ; v3(3455.01,1735) v3(3510.01,1735) 3560.01,1735 3790.01,1965 3950.01,1965 v3(3996.49,2011.49) v3(4030.01,2045) ; USB.2@4536.65,2596.4 USB.15@4591.77,2596.4 4844.93,2596.4 USB.17@4870.51,2570.8 ; USB.7@4536.65,2820.8 USB.10@4591.77,2820.8 ; 2302.41,1852.8 2462.41,1852.8
  Bottom Layer w23.62: v1(2847.57,1950.48) 2869.97,1972.88 C50.2@2869.96,2027.8 C51.2@2934.85,2027.8
  Bottom Layer w27.56: v3(2575.01,1840) v3(2625.01,1840) 2714.7,1929.7 v1(2714.7,1945.08) v1(2738.8,1969.2)
  Bottom Layer w39.37: v3(2575.01,1840) v3(2625.01,1840) 2770.01,1695 3415,1695 v3(3455.01,1735) v3(3510.01,1735) ; v3(3996.49,2011.49) v3(4030.01,2045) 4205,2045 4650,2490 4650,2560 4628.73,2581.55 ; USB.2@4536.65,2596.4 USB.15@4591.77,2596.4 ; USB.10@4591.77,2820.8 4618.81,2820.8 4644.6,2795 4644.6,2655 ; 4628.73,2596.4 USB.15@4591.77,2596.4 ; 4644.6,2670 4644.6,2640 4628.73,2626.9 ; USB.15@4591.77,2596.4 4613.88,2596.4 4628.73,2581.55 ; USB.15@4591.77,2596.4 4598.23,2596.4 4628.73,2626.9 ; 4628.73,2581.55 4628.73,2626.9
VCC: C38.1 C39.1 C40.1 U8.3 U8.4 U8.22 | length 812.1
  Top Layer w8: C38.1@3741.36,3573.6 3754.12,3560.84 U8.22@3815.07,3560.84 ; C39.1@3828.8,3326.16 3887.41,3384.76 3887.41,3432.8 ; 3842.41,3352.8 3847.41,3352.8 3882.41,3387.8 3882.41,3430.52 U8.3@3878.07,3434.87
  Top Layer w11.81: v1(3633.28,3528.67) 3644.61,3540 3707.8,3540 C38.1@3741.36,3573.6 ; C39.1@3828.8,3326.16 3887.57,3384.92 3887.57,3435.48 ; 3842.57,3360.48 3844.6,3362.52 3857.12,3362.52
  Bottom Layer w11.81: v1(3633.28,3528.67) 3633.3,3516.3 3764.61,3385 v1(3764.61,3360)
  other v1: 3804.61,3360
pads on no net: AUDIO1. BLUETOOTH.1 BLUETOOTH.2 BLUETOOTH.3 BLUETOOTH.10 BLUETOOTH.11 BLUETOOTH.13 RJ45. RJ45.7 SHTC3.5 ST-LINK.3 ST-LINK.9 U3.4 U3.6 U5.1 U5.2 U5.9 U5.10 U5.11 U5.12 U5.15 U5.25 U5.27 U5.36 U5.48 U7.4 U7.11 U7.14 U7.16 U7.17 U7.19 U7.21 U7.22 U7.28 U7.29 U7.40 U7.41 U7.42 U7.43 U7.45 U7.46 U8.1 U8.2 U8.12 U8.13 U8.21 U8.23 U8.24 U8.25 U10.1 U10.2 U10.9

## Polygon pours and split planes (outlines as drawn)
GND on Bottom Layer (solid): 1500,4010 1500,1500 4645,1500 4645,2380 4650,2385 5070,2385 5070,3990 5090,4010
GND on Top Layer (solid): 1540,3975 1540,1610 1545,1605 4645,1605 4645,2365 4645,2380 4650,2385 5070,2385 5070,3960 5045,3985

## Keep-outs
Keep-Out Layer:
  lines w10: 1618.81,1757.93 ccw(c1717.23,1757.93) 1717.23,1659.51 ; 1618.81,3805.18 cw(c1717.23,3805.18) 1717.23,3903.6 ; 4906.21,1659.51 ccw(c4906.21,1757.93) 5004.63,1757.93 ; 4906.21,3903.6 cw(c4906.21,3805.18) 5004.63,3805.18

## Other copper
Top Layer:
  region net 3V3: 3909.55,3434.86 3904.61,3429.91 3904.61,3405 3904.61,3355 3898.8,3349.2 3898.8,3326.16 3899.97,3325 3919.61,3325
  region net 3V3: 2564.61,2511.9 2537.11,2539.4 2549.14,2563.6 2604.14,2563.6 2612.48,2555.27 2629.14,2548.6 2564.61,2511.9
  region net 3V3: 2564.61,2511.9 2611.3,2558.6 2637.34,2558.6 2637.34,2513.6
  region net L1_1: 1878.81,1943.6 1877.4,1937.8 1868.64,1933.44 1856.2,1933.44 1851.2,1933.44 1823.81,1933.6 1833.81,1943.6
  region net 3V3: 1886.4,1983.13 1828.65,2040.88 1783.81,2040.88 1841.56,1983.13
  region net 3V3: 2293.01,2295.3 2293.01,2288.4 2279.61,2275 2252.14,2277.8 2238.61,2291.34 2238.61,2294 2252.41,2307.8
  region net 3V3: 1882.4,1987.8 1877.4,1977.8 1867.08,1972.47 1858.4,1972.47 1848.4,1982.47 1848.4,1987.47
  region net 3V3: 2863.8,3401.16 2853.12,3390.48 2802.57,3390.48 2767.57,3390.48 2757.57,3400.48 2767.57,3410.48 2822.57,3410.48
  region net 3V3: 2863.8,3456.28 2817.57,3445.48 2767.57,3445.48 2767.57,3465.48 2854.61,3465.48 2863.8,3456.28
  region net 3V3: 3354.61,3016.9 3361.03,3010.48 3377.57,3010.48 3427.57,3010.48 3441.11,3024.02 3441.11,3030.48 3407.57,3030.48
  region net LEDK: 2863.8,3428.72 2872.53,3420 2944.61,3420 2944.61,3430 2949.61,3435 2944.61,3440
  rectangle net VBUS: 1873.81,1868.6 1898.81,1928.6
  rectangle net VBUS: 1948.81,1883.6 1973.81,1928.6
  rectangle net 3V3: 1818.81,1977.8 1897.4,2143.6
  rectangle net 3V3: 1838.81,2023.6 1933.81,2063.6
  rectangle net 3V3: 3878.8,3308.6 4003.8,3343.6
  rectangle net VCC: 3738.8,3308.6 3848.8,3368.6
  rectangle net 3V3: 3003.8,2723.6 3074.14,2798.6
  rectangle net 3V3: 3028.8,2758.6 3113.8,2788.6
  rectangle net 3V3: 3033.8,2773.6 3093.8,2803.6
  rectangle net 3V3: 4107.56,2230.48 4152.56,2485.48
  rectangle net 3V3: 2708.8,3358.6 2773.8,3468.6
  rectangle net 3V3: 3421.32,3020.48 3457.57,3087.36
  rectangle net 3V3: 2862.2,1702 2897.2,1812
  rectangle net 3V3: 3117.22,1701.99 3152.22,1806.99
  rectangle net 3V3: 2177.57,2272.8 2253.61,2310.48
  rectangle net 3V3: 2619.14,2503.6 2654.14,2568.6
  rectangle net 3V3: 3312.74,2217.8 3367.74,2382.8
  rectangle net 3V3: 1889.14,2003.6 1929.14,2063.6
  rectangle net VCC: 3872.41,3417.8 3897.41,3452.8
  rectangle net 3V3: 1957.57,3230.48 2002.57,3390.48
  rectangle net 3V3: 3410.01,3020 3455.01,3120
Bottom Layer:
  rectangle net R50_2: 2576.64,3553.6 2691.64,3593.6
  rectangle net R50_2: 2649.14,3498.6 2679.14,3593.6
  rectangle net R49_1: 2719.14,3598.6 2769.14,3733.6
  rectangle net 3V3: 2708.8,3358.6 2773.8,3468.6
  rectangle net 3V3: 2704.14,3358.6 2744.14,3533.6
  rectangle net U5_33: 3979.61,2205 4029.61,2230
  rectangle net 3V3: 3880.01,3310 4005.01,3345

## Silkscreen, mask and mechanical layers (free items; w line width, h text height)
Top Overlay:
  text "1" at 2947.41,3742.8 h45 r180
  text "13" at 2937.41,3352.8 h45 r359
  text "ON" at 4204.6,2975 h45
  text "TX" at 3834.51,2935 h40
  text "D-" at 3834.41,2885 h40
  text "STM32F411CEU6" at 2215.01,2855 h62.99
  text "D+" at 3834.41,2835 h40
  text "RX" at 3834.39,2785 h40
Bottom Overlay:
  lines w10 net S$266549: 3342.35,3185 3702.6,3185 3702.6,2797.2
  lines w10 net S$266553: 3320.85,2795 3702.6,2795
  lines w11.81 net S$147634: 1684.5,2795 1684.5,2850 1684.5,3185 3359.5,3185 3359.5,3180 3359.5,2795 1684.5,2795
  lines w11.81 net S$147638: 2079.5,2805 2079.5,3185
  lines w11.81 net S$147642: 1684.5,3005 2079.5,3005
  lines w11.81 net S$147646: 2382.49,2795 2382.49,3185
  lines w11.81 net S$147650: 2654.49,2795 2654.49,3185
  lines w11.81 net S$147654: 3017.16,2795 3017.16,3185
  lines w11.81 net S$147658: 2079.5,3005 2382.49,3005
  text "ON" at 4482.4,3482.8 h45
  text "RESTI" at 4922.4,3437.8 h45
  text "CFG0" at 4922.4,3387.8 h45
  text "REST" at 4917.4,3337.8 h45
  text "USB/ETHERNET" at 2034.4,3125 h45 r358
  text "Bluetooth" at 2346.7,3125 h45
  text "VS1053B" at 3672.59,3116.09 h45
  text "SD Card" at 2980.2,3115 h45 r359
  text "1.05_LCD" at 3329.49,3115 h45
  text "W25Q256" at 2607.59,3097.2 h45
  text "VS_MOSI--PA7" at 3667.59,3082.2 h45
  text "D-/MCU_RX--PA12" at 2029.51,3080 h45 r359
  text "SDIO_CMD--PA6" at 2980.2,3078.33 h45
  text "MCU_TX--PA2" at 2346.7,3070 h45
  text "LCD_CS--PB10" at 3330.01,3070 h45
  text "D+/MCU_TX--PA11" at 2034.51,3035 h45 r359
  text "F CS--PC13" at 2613.89,3034.68 h45
  text "VS_MISO--PB4" at 3667.59,3033.32 h45
  text "SDIO_D0--PB7" at 2975.2,3026.67 h45
  text "MCU_RX--PA3" at 2351.7,3025 h45
  text "LCD_BLK--PB1" at 3325.01,3020 h45
  text "3V3" at 3797.41,3002.8 h45
  text "TX" at 3892.41,3002.8 h45
  text "RX" at 3992.41,3002.8 h45
  text "GND" at 4112.4,3002.8 h45 r359
  text "VS_XCS--PA2" at 3667.59,2994.43 h45
  text "SPIO_D1--PA8" at 2980.2,2980 h45
  text "MISO--PB4" at 2610.59,2973.85 h45
  text "LCD_RES--PB12" at 3330.01,2970 h45
  text "VS_SCK--PA5" at 3667.59,2945.54 h45
  text "IIC" at 2314.8,2935 h45
  text "SDIO_D2--PB9" at 2975.2,2933.33 h45
  text "LED--PB6" at 1972.6,2927.2 h45
  text "LCD_DC--PB14" at 3330.01,2925 h45
  text "MOSI--PA7" at 2610.59,2918.02 h45
  text "VS_XDCS--PA3" at 3667.59,2901.66 h45
  text "SDIO_D3--PB5" at 2975.2,2891.67 h45
  text "SDA--PB9" at 2317.59,2886.1 h45
  text "LCD_SCK--PB13" at 3330.01,2880 h45
  text "KEY1--PA0" at 1972.1,2877.2 h45
  text "SCK--PA5" at 2603.39,2862.2 h45
  text "VS_DREQ--PA10" at 3667.59,2857.77 h45
  text "SDIO_SCK--PB15" at 2982.59,2837.2 h45
  text "SCK--PB8" at 2312.59,2832.2 h45
  text "LCD_SDA--PA1" at 3330.01,2830 h45
  text "LEY2--PB0" at 1977.6,2822.2 h45
  text "VS_RST--PA15" at 3667.59,2812.19 h45
  text "3V3" at 2966.01,2387 h45
  text "CLK" at 2976.01,2287 h45 r359
  text "DIO" at 2971.01,2197 h45
  text "GND" at 2976.01,2087 h45 r359
  text "WT:D" at 2585.01,2015 h137.79

## Text inside footprints (layer, text, board x,y; h text height)
SW2: Top Overlay "ON" at 4132.4,2952.8 h20 r180; Top Overlay "ON" at 4132.4,2802.8 h20 r180; Top Overlay "ON" at 4132.4,2852.8 h20 r180; Top Overlay "ON" at 4132.4,2902.8 h20 r180